# EAGLE board Kheera-PanelPCB (EAGLE 9.6.0)
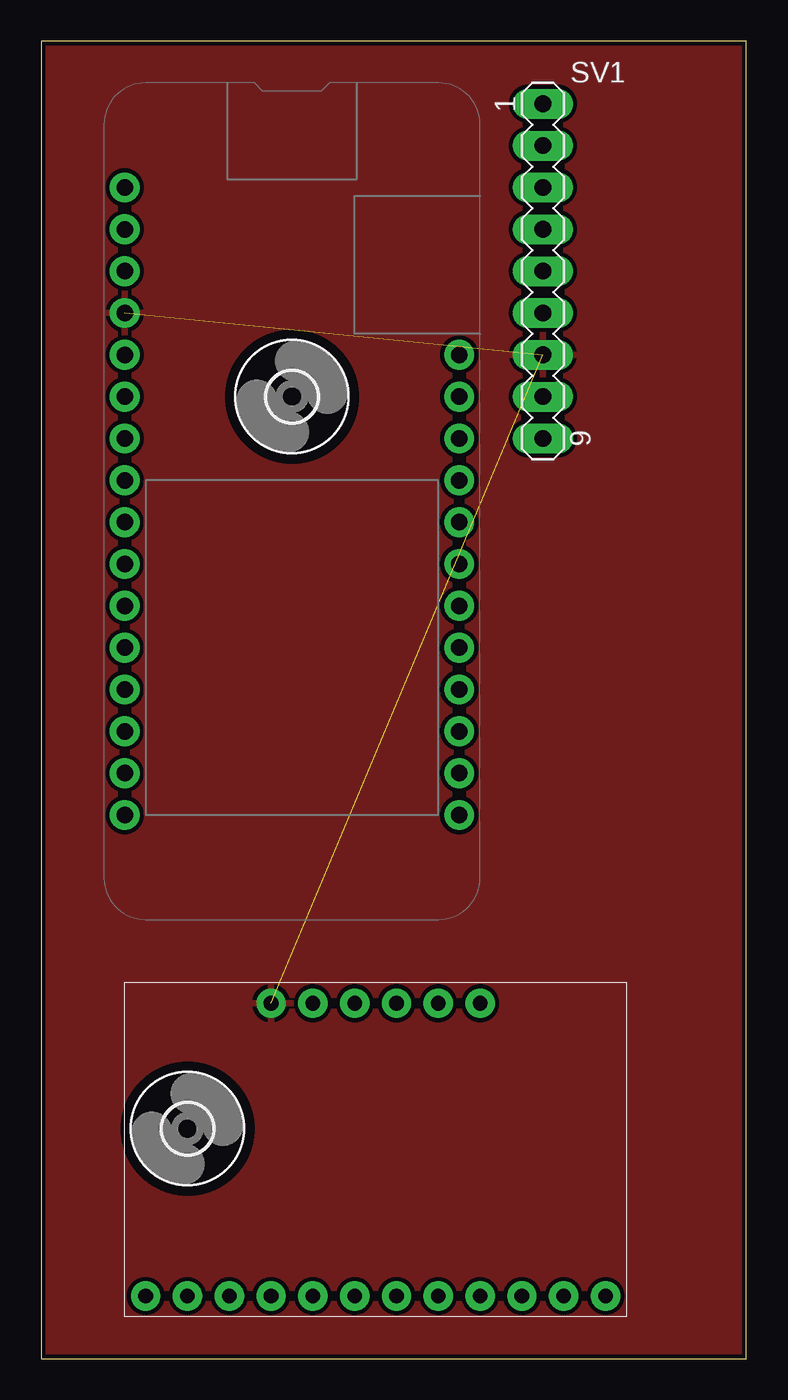
[diagram p0: board, top side]
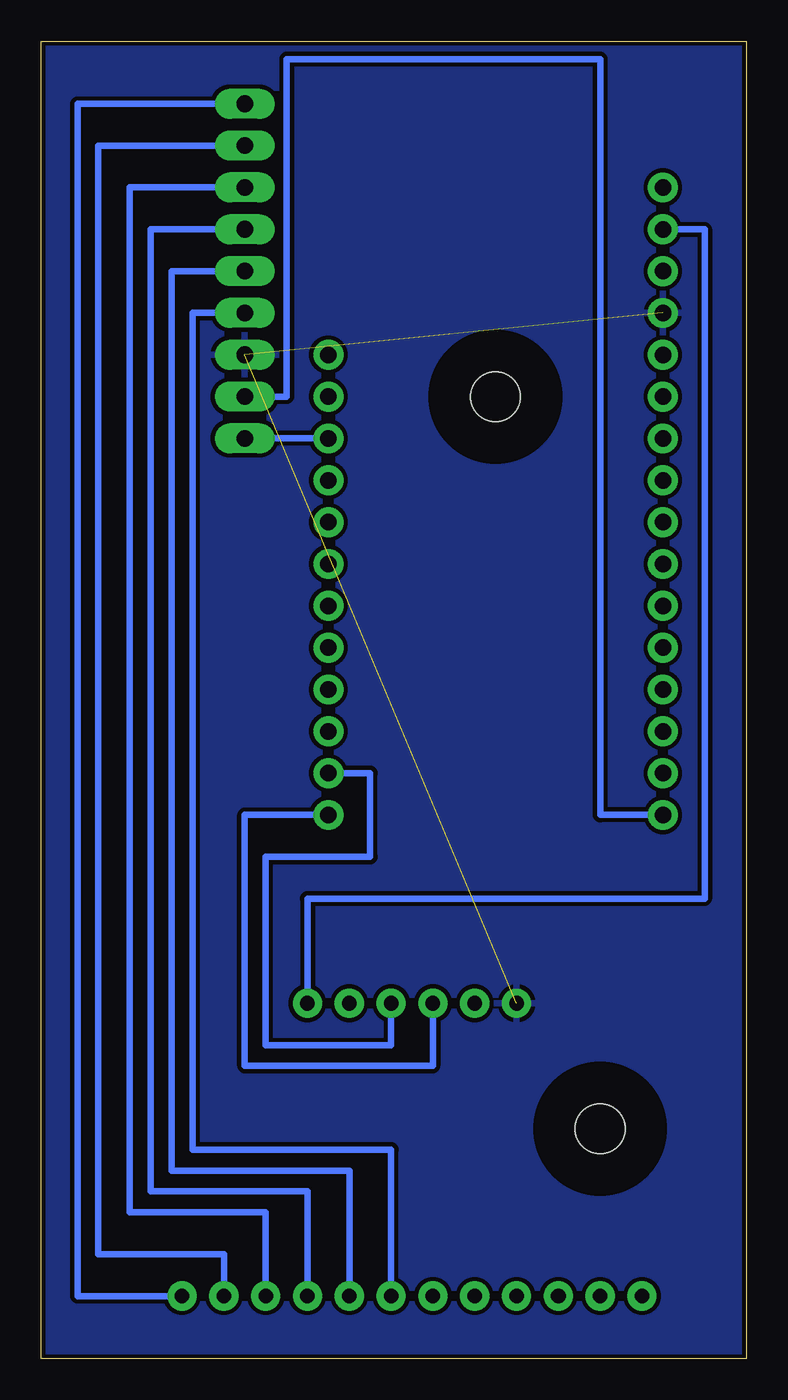
[diagram p1: board, bottom side, seen from below]

Size 42.85 x 80 mm. Coordinates in mm from the lower left corner, seen from the top.
Outline: 0,0 42.85,0 42.85,80 0,80 0,0
Copper layers (1*16): Top 0.035mm / dielectric 1.5mm / Bottom 0.035mm
Design rules "fablab_lpkf": minimum track width 16mil, minimum drill 32mil, track to track 10mil, track to pad 10mil, pad to pad 10mil, via to via 10mil, smd to smd 10mil, copper to edge 10mil, drill to drill 10mil, minimum pad ring 16mil, minimum via ring 16mil, stop-mask expansion 4mil, vias tented up to drill 0mil, thermal gap 10mil

## Footprints (pad centres in the part's own frame; a part is rotated, then mirrored left to right if it is on the bottom)
3,0 = hole 3: 0,0
RARNDT-MISCELANEOUS_FEATHERBOARD_ESP32 = drill 1: 1 -19.05,-10.16; 2 -16.51,-10.16; 3 -13.97,-10.16; 4 -11.43,-10.16; 5 -8.89,-10.16; 6 -6.35,-10.16; 7 -3.81,-10.16; 8 -1.27,-10.16; 9 1.27,-10.16; 10 3.81,-10.16; 11 6.35,-10.16; 12 8.89,-10.16; 13 11.43,-10.16; 14 13.97,-10.16; 15 16.51,-10.16; 16 19.05,-10.16; 17 19.05,10.16; 18 16.51,10.16; 19 13.97,10.16; 20 11.43,10.16; 21 8.89,10.16; 22 6.35,10.16; 23 3.81,10.16; 24 1.27,10.16; 25 -1.27,10.16; 26 -3.81,10.16; 27 -6.35,10.16; 28 -8.89,10.16
MA09-1 = drill 1.016 long: 1 -10.16,0; 2 -7.62,0; 3 -5.08,0; 4 -2.54,0; 5 0,0; 6 2.54,0; 7 5.08,0; 8 7.62,0; 9 10.16,0
MS-121 = drill 0.889 pad 1.778: 0 8.89,-13.97; 1 8.89,-11.43; 2 8.89,-8.89; 3 8.89,-6.35; 3.3V -8.89,6.35; 4 8.89,-3.81; 5 8.89,-1.27; 6 8.89,1.27; 7 8.89,3.81; 8 8.89,6.35; 9 8.89,8.89; 10 8.89,11.43; 11 8.89,13.97; ADD -8.89,-3.81; GND -8.89,-6.35; IRQ -8.89,3.81; SCL -8.89,1.27; SDA -8.89,-1.27

## Placement (x,y rotation side)
H1  MOUNT-HOLE3.0  [3,0]  15.24,58.42 0 top
H2  MOUNT-HOLE3.0  [3,0]  8.89,13.97 0 top
M1  RARNDT-MISCELANEOUS_FEATHERBOARD_ESP32FETHERWING_DIM_ESP32  [RARNDT-MISCELANEOUS_FEATHERBOARD_ESP32]  15.24,52.07 270 top
SV1  [MA09-1]  30.48,66.04 270 top
U$5  MS-121  [MS-121]  20.32,12.7 270 top

## Library data of the parts
H1 H2 = holes
M1 = StewartPlatform
SV1 = con-lstb; OC_FARNELL: unknown; OC_NEWARK: unknown
U$5 = MS-121

## Nets
3V3: M1.2 U$5.3.3V
GND: M1.4 SV1.7 U$5.GND
N$1: M1.16 SV1.8
N$2: SV1.1 U$5.11
N$3: SV1.2 U$5.10
N$4: SV1.3 U$5.9
N$5: SV1.4 U$5.8
N$6: SV1.5 U$5.7
N$7: SV1.6 U$5.6
SCL: M1.18 U$5.SCL
SDA: M1.17 U$5.SDA
USB: M1.26 SV1.9

## Tracks (layer width: path | path; a pad name or v marks a point on that pad's centre or on a via)
3V3
  Bottom 0.406: M1.2 2.54,68.58 2.54,27.94 26.67,27.94 U$5.3.3V
GND  (2 unrouted)
  pour Top: -1.27,-7.62 -1.27,85.09 44.45,85.09 44.45,-7.62
  pour Bottom: -2.54,-8.89 -2.54,86.36 45.72,86.36 45.72,-8.89
N$1
  Bottom 0.406: M1.16 8.89,33.02 8.89,78.91 27.94,78.91 27.94,58.42 SV1.8
N$2
  Bottom 0.406: U$5.11 40.64,3.81 40.64,76.2 SV1.1
N$3
  Bottom 0.406: U$5.10 31.75,6.35 39.37,6.35 39.37,73.66 SV1.2
N$4
  Bottom 0.406: U$5.9 29.21,8.89 37.47,8.89 37.47,71.12 SV1.3
N$5
  Bottom 0.406: U$5.8 26.67,10.16 36.2,10.16 36.2,68.58 SV1.4
N$6
  Bottom 0.406: U$5.7 24.13,11.43 34.92,11.43 34.92,66.04 SV1.5
N$7
  Bottom 0.406: U$5.6 21.59,12.7 33.66,12.7 33.66,63.5 SV1.6
SCL
  Bottom 0.406: U$5.SCL 21.59,19.05 29.21,19.05 29.21,30.48 22.86,30.48 22.86,35.56 M1.18
SDA
  Bottom 0.406: U$5.SDA 19.05,17.78 30.48,17.78 30.48,33.02 M1.17
USB
  Bottom 0.406: M1.26 SV1.9